# Altium PCB PCB1.PcbDoc
Units mil, origin at the board's own origin, x right, y up, seen from the top; angles counter-clockwise.
Board outline 4765 x 4565 mil, 2 copper layers (Top Layer, Bottom Layer); 51 components, 61 nets, 223 pads, 48 vias.
Unrouted connection lines stored in the file: 5.
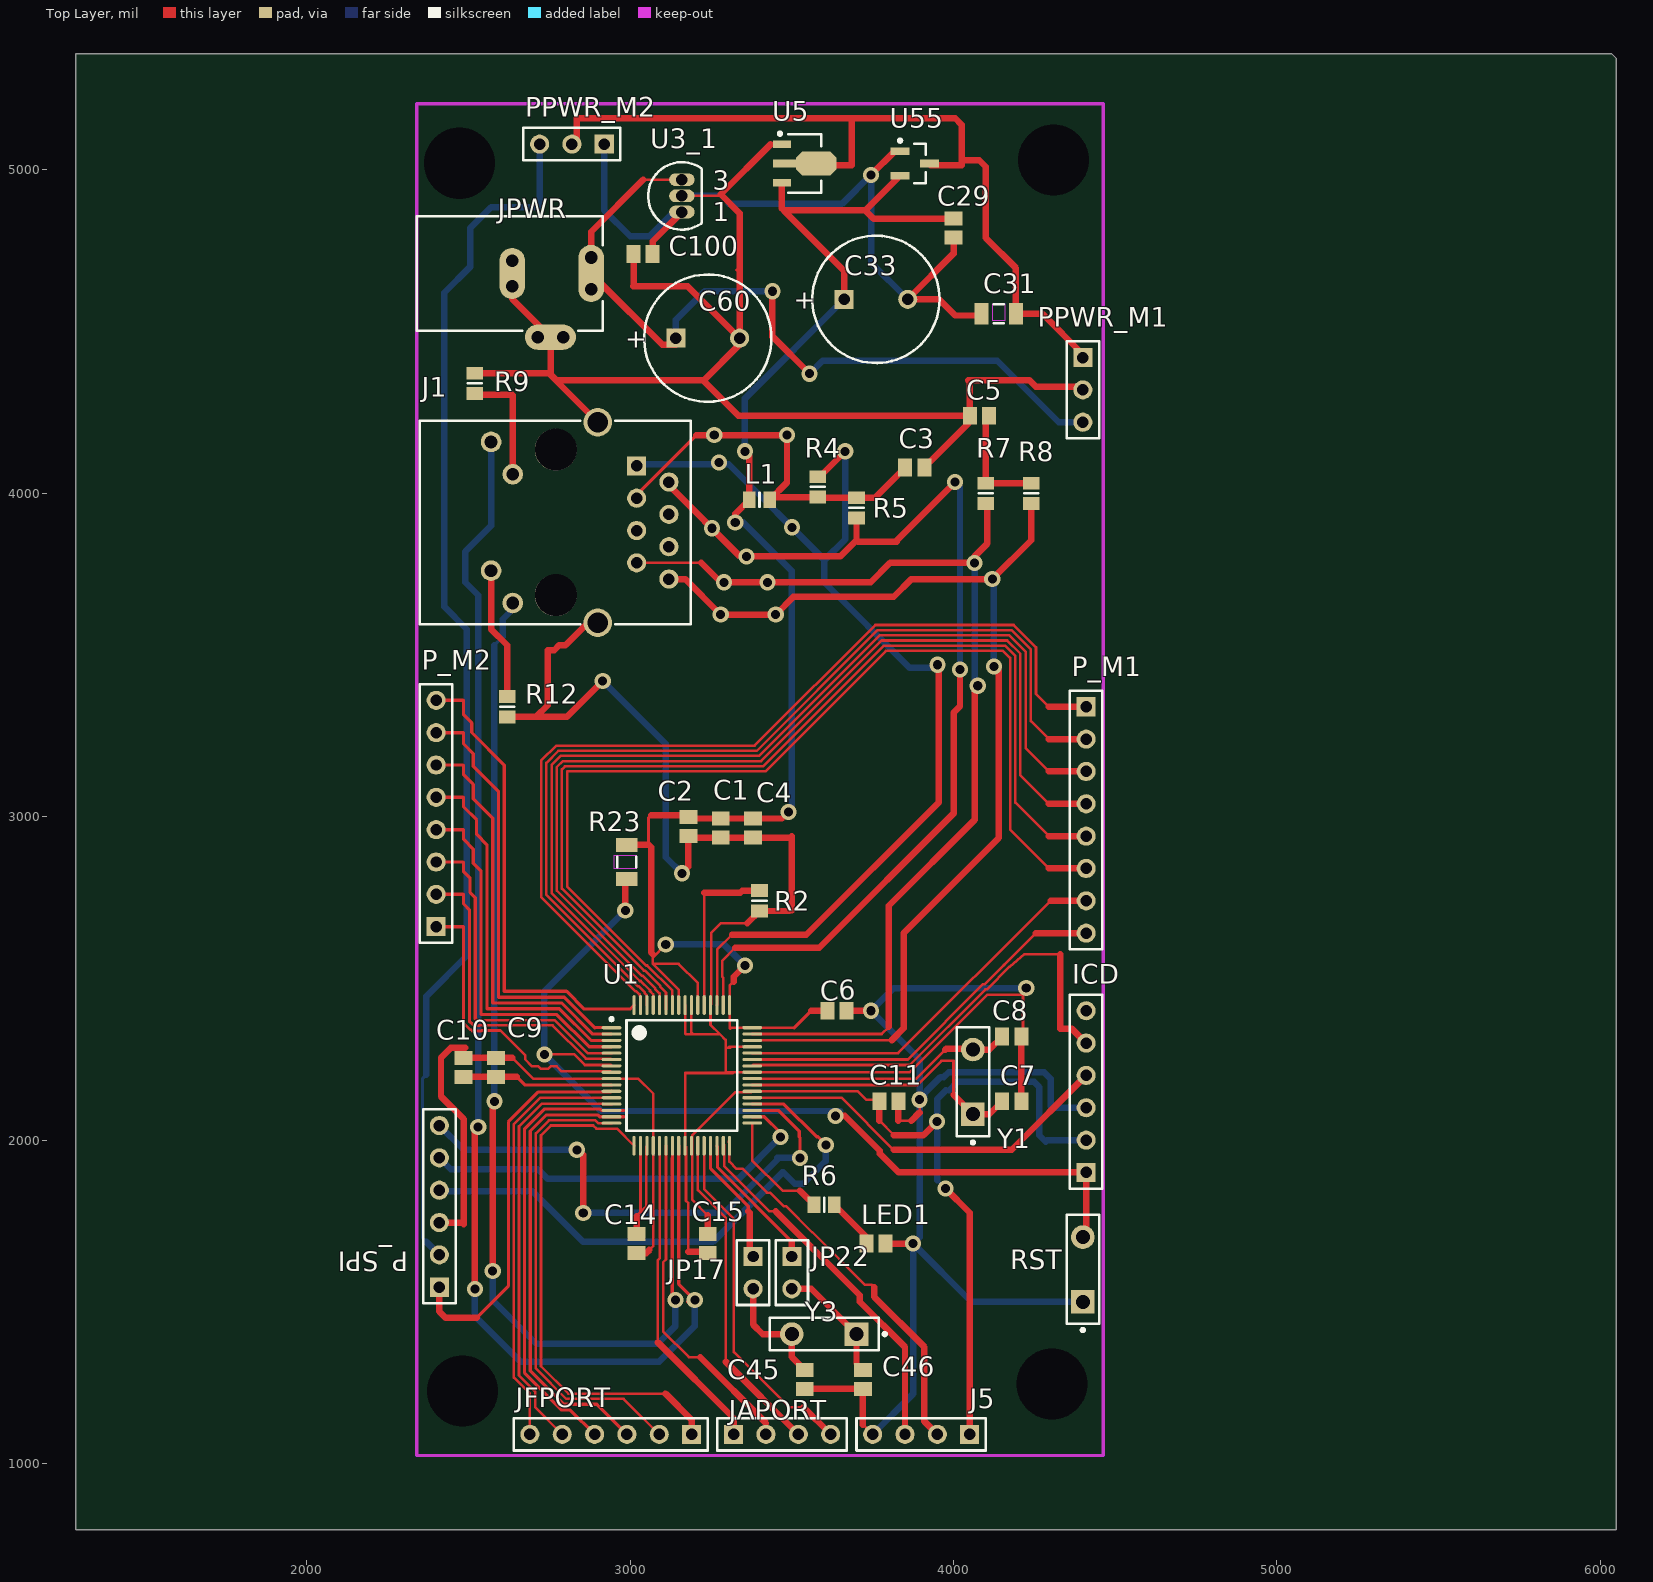
[diagram p0: Top Layer view]
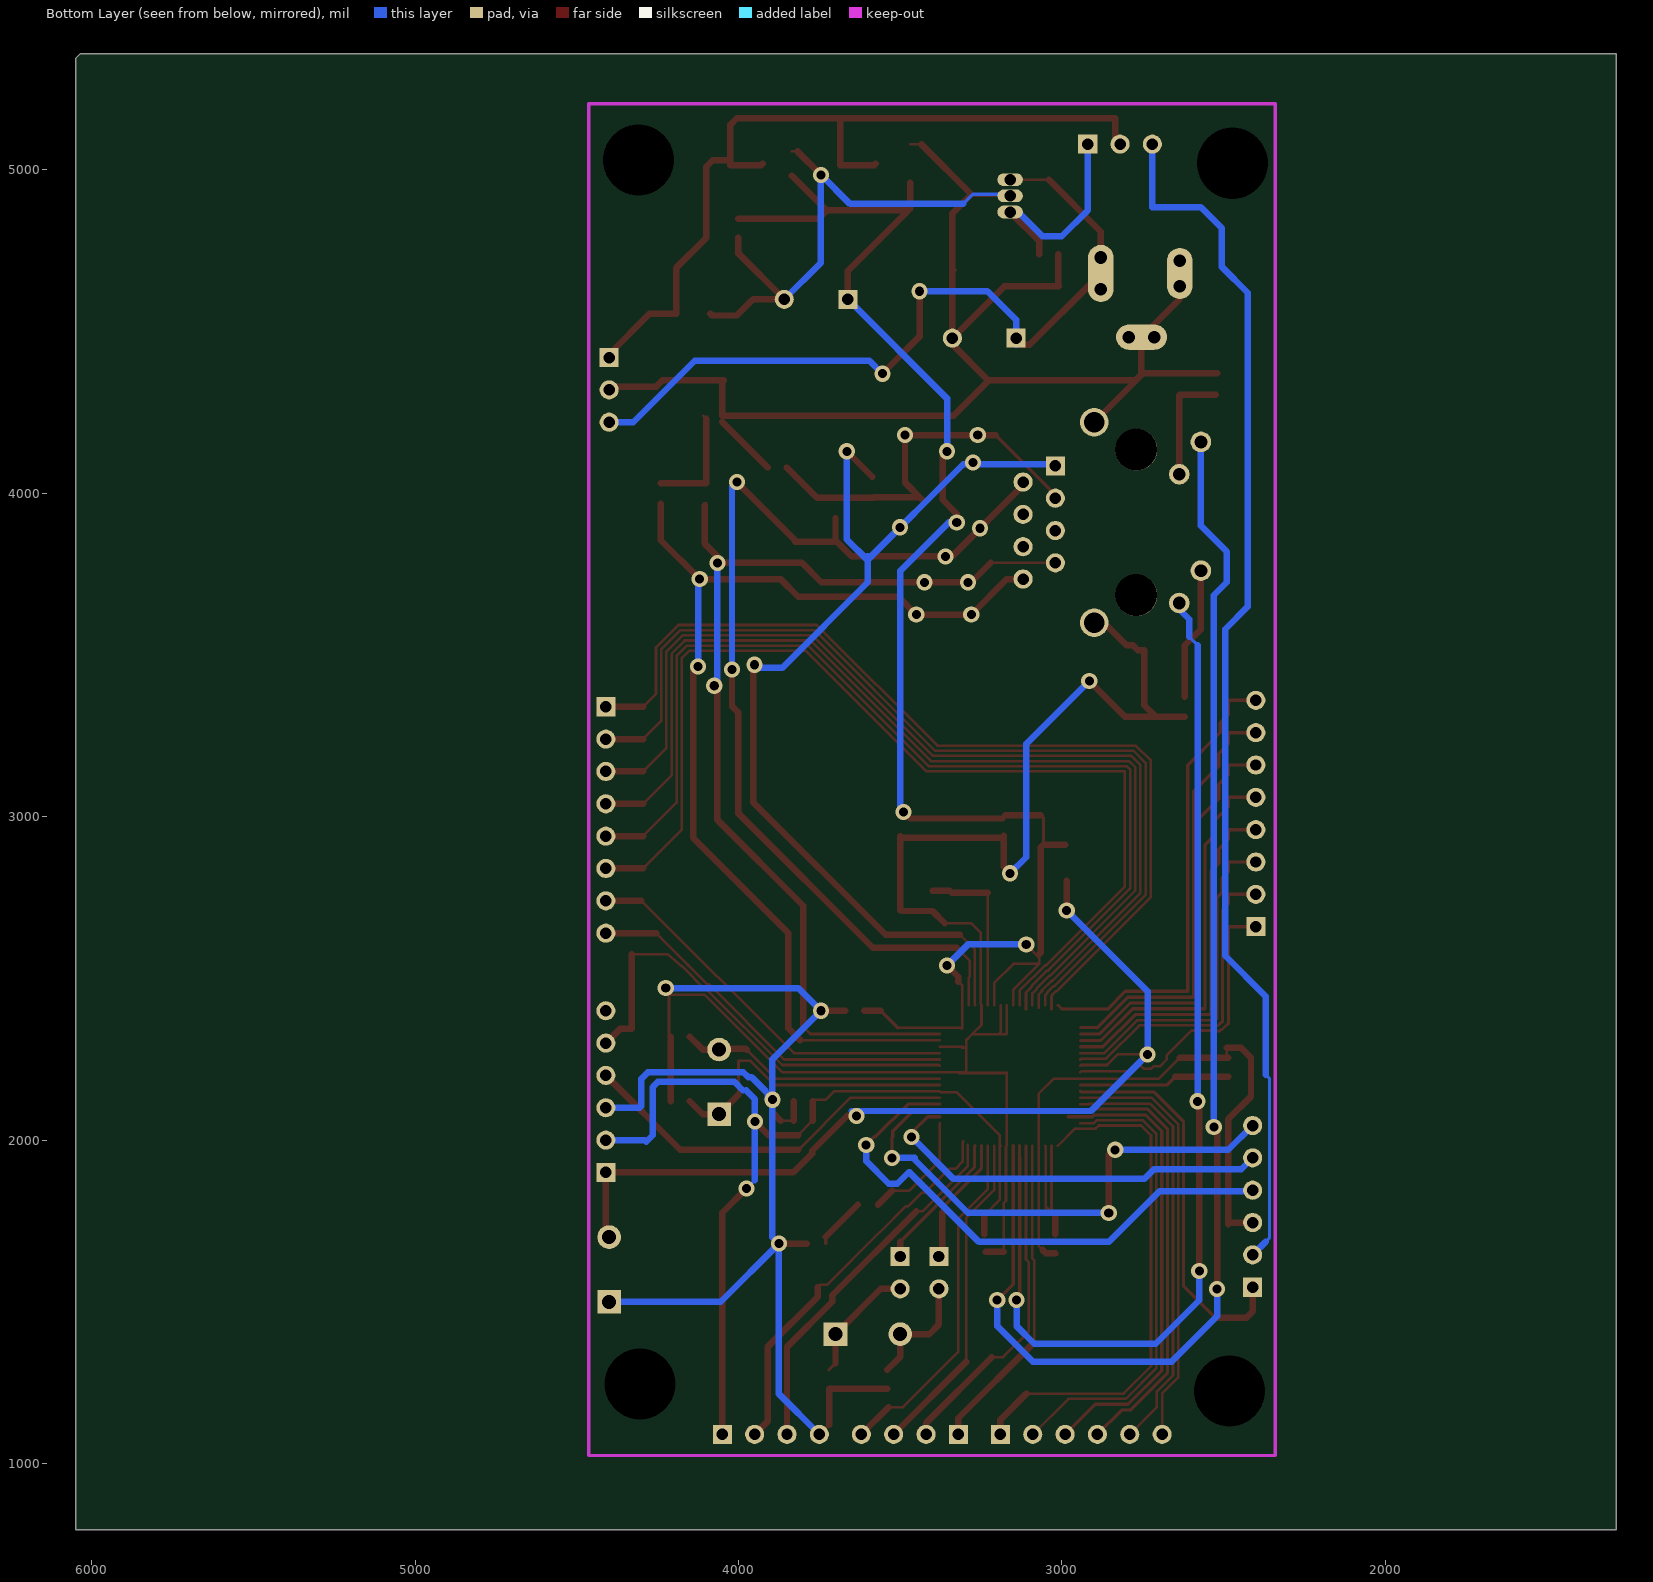
[diagram p1: Bottom Layer view, seen from below]

## Layer stack, top to bottom
Top Layer: signal copper 1.4
Dielectric: dielectric 12.6, FR-4, Dk 4.8
Bottom Layer: signal copper 1.4

## Board outline
1285,5360 1285,795 6050,795 6050,5345 6035,5360

## Design rules (kind name [scope] priority, off if disabled: settings)
Clearance [All] p1: gap=8
PolygonConnect [All] p1: connectstyle=Relief reliefconductorwidth=10 reliefentries=4 polygonreliefangle="90 Angle"
RoomDefinition Sheet_MAGJACK [InComponentClass('Sheet_MAGJACK')] p1: confinementstyle=ConfineIn formatcopy=TRUE lockcomponents=FALSE outline 4600,3765 4780,3765 4780,4105 4600,4105
RoomDefinition Sheet1 [InComponentClass('Sheet1')] p2: confinementstyle=ConfineIn formatcopy=TRUE lockcomponents=FALSE outline 4535,1535 4815,1535 4815,2115 4535,2115
RoutingVias [All] p1: holewidth=28 width=50 viastyle="Through Hole" minholewidth=28 minwidth=50 maxholewidth=28 maxwidth=50
SMDNeckDown [All] p1: percent=105.000
SilkscreenOverComponentPads [All] p1: minsilkscreentomaskgap=10
SolderMaskExpansion [All] p1: expansion=4
Width [All] p1: maxlimit=20 minlimit=8 preferedwidth=10
27 further rules are at their usual default settings.

## Classes and differential pairs
component class Sheet_MAGJACK: C3 C5 C29 C31 C33 C60 C100 J1 J5 JAPORT JFPORT JPWR L1 LED1 P_M1 P_M2 P_SPI PPWR_M1 PPWR_M2 R4 R5 R6 R7 R8 R9 R12 U3_1 U5 U55
component class Sheet1: C1 C2 C4 C6 C7 C8 C9 C10 C11 C14 C15 C45 C46 ICD JP17 JP22 R2 R23 RST U1 Y1 Y3

## Components (designator, comment, footprint, x,y, rotation, side; value= is the part's Value field where it differs from the comment)
C1 "0.1uF" CAPC2012L 3280,2965 r90 top
C2 "0.1uF" CAPC2012L 3180,2970 r90 top
C3 "0.1uF" CAPC2012L 3880,4080 r0 top
C4 "0.1uF" CAPC2012L 3380,2965 r90 top
C5 "0.1uF" CAPC2012L 4080,4240 r0 top
C6 "0.1uF" CAPC2012L 3640,2400 r180 top
C7 "33pF" CAPC2012L 4180,2120 r180 top
C8 "33pF" CAPC2012L 4180,2320 r180 top
C9 "1uF" CAPC2012L 2585.47,2225 r270 top
C10 "0.1uF" CAPC2012L 2485,2225 r270 top
C11 "0.1uF" CAPC2012L 3800,2120 r180 top
C14 "0.1uF" CAPC2012L 3020,1680 r90 top
C15 "0.1uF" CAPC2012L 3240,1680 r90 top
C29 "0.1uF" CAPC2012L 4000,4820 r90 top
C31 "2.2uF" CAPC3216L 4140,4555 r0 top
C33 "220mF" CAPPR5-10x12.5 3760,4600 r0 top
C45 "22pF" CAPC2012L 3540,1260 r90 top
C46 "22pF" CAPC2012L 3720,1260 r90 top
C60 "220mF" CAPPR5-10x12.5 3240,4480 r0 top
C100 "0.1uF" CAPC2012L 3040,4740 r0 top
ICD "Header 6" HDR1X6 4410,1900 r90 top
J1 "LU1T516-43LF" CON_RJ45_RA_LEDS 2770,3910 r90 top
J5 "Header 4" HDR1X4 4050,1090 r180 top
JAPORT "Header 4" HDR1X4 3320,1090 r0 top
JFPORT "Header 6" HDR1X6 3190,1090 r180 top
JP17 "Header 2" HDR1X2 3380,1640 r270 top
JP22 "Header 2" HDR1X2 3500,1640 r270 top
JPWR "PWR2.5" KLD-0202 2340,4680 r0 top
L1 "330" RESC2012L 3400,3980 r0 top
LED1 "LED2" CAPC2012L 3760,1680 r0 top
P_M1 "Header 8" HDR1X8 4410,3340 r270 top
P_M2 "Header 8" HDR1X8 2400,2660 r90 top
P_SPI "Header 6" HDR1X6 2410,1545 r90 top
PPWR_M1 "Header 3" HDR1X3 4400,4420 r270 top
PPWR_M2 "Header 3" HDR1X3 2920,5080 r180 top
R2 "2.26K 1%" RESC2012L 3400,2740 r90 top
R4 "49.9" RESC2012L 3580,4020 r90 top
R5 "49.9" RESC2012L 3700,3955 r270 top
R6 "180" RESC2012L 3600,1800 r0 top
R7 "49.9" RESC2012L 4100,4000 r270 top
R8 "49.9" RESC2012L 4240,4000 r270 top
R9 "180" RESC2012L 2520,4340 r270 top
R12 "180" RESC2012L 2620,3340 r270 top
R23 "10K" RESC3216L 2990,2860 r90 top
RST "SW-PB" SPST-2 4400,1600 r90 top
U1 "PIC18F67J60-I/PT" TQFP-PT64_L 3160,2200 r0 top
U3_1 "MC78L05ABP" 29-04 3160,4920 r0 top
U5 "MCP1703T-3302E/MB" SOT-89-MB3_N 3540,5020 r0 top
U55 "MCP1702T-3302E/CB" SOT-23A-CB3_N 3880,5020 r0 top
Y1 "25MHz" SPST-2 4060,2180 r90 top
Y3 "32KHz" SPST-2 3600,1400 r180 top

## Footprints (in the part's own frame and the unit in brackets; to place one, negate y for a bottom-side part, rotate by r counter-clockwise, add the part's x,y. Pads: shape width x height; smd on the part's side, far side on the other; paste and mask are expansions set on the pad)
29-04 [mm]
  oval 2x1 hole 0.9: 1(0,-1.27) 2(0,0) 3(0,1.27)
  silkscreen extent -2.65,-2.65 1.55,2.65
CAPC2012L [mm] "Chip Capacitor, Body 2.0x1.3mm, IPC High Density"
  rect 1.1x1.4 smd: 1(-0.75,0) 2(0.75,0)
  body extent -1.1,-0.72 1.1,0.72, height 1.4
CAPC3216L [mm] "Chip Capacitor, Body 3.2x1.6mm, IPC High Density"
  rect 1.1x1.7 smd: 1(-1.35,0) 2(1.35,0)
  silkscreen extent -0.4,-0.75 0.4,0.75, body extent -1.7,-0.9 1.7,0.9, height 1.3
CAPPR5-10x12.5 [mm] "Capacitor, Electrolytic, Radial; Body 10 x 12.5 mm (Dia.xH typ); Pin Spacing 5 mm (typ)"
  rect 1.5x1.5 hole 0.9: 1(-2.5,0)
  round 1.5 hole 0.9: 2(2.5,0)
  silkscreen extent -5,-5 5,5
CON_RJ45_RA_LEDS [mm]
  rect 1.5x1.5 hole 0.9: 1(4.445,-6.35)
  round 1.5 hole 0.9: 2(3.175,-8.89) 3(1.905,-6.35) 4(0.635,-8.89) 5(-0.635,-6.35) 6(-1.905,-8.89) 7(-3.175,-6.35) 8(-4.445,-8.89)
  round 1.62 hole 1: 9(6.325,5.08) 10(3.785,3.38) 11(-3.785,5.08) 12(-6.325,3.38)
  round 2.23 hole 1.6: MH1(7.875,-3.3) MH2(-7.875,-3.3)
  round 3.3 hole 3.3 unplated: MH3(5.715,0) MH4(-5.715,0)
  silkscreen extent -8,-10.6 8,10.7
HDR1X2 [mm] "Connector; Header; 2 Position"
  rect 1.5x1.5 hole 0.9: 1(0,0)
  round 1.5 hole 0.9: 2(2.54,0)
  silkscreen extent -1.27,-1.27 3.81,1.27
HDR1X3 [mm] "Connector; Header; 3 Position"
  rect 1.5x1.5 hole 0.9: 1(0,0)
  round 1.5 hole 0.9: 2(2.54,0) 3(5.08,0)
  silkscreen extent -1.27,-1.27 6.35,1.27
HDR1X4 [mm] "Connector; Header; 4 Position"
  rect 1.5x1.5 hole 0.9: 1(0,0)
  round 1.5 hole 0.9: 2(2.54,0) 3(5.08,0) 4(7.62,0)
  silkscreen extent -1.27,-1.27 8.89,1.27
HDR1X6 [mm] "Connector; Header; 6 Position"
  rect 1.5x1.5 hole 0.9: 1(0,0)
  round 1.5 hole 0.9: 2(2.54,0) 3(5.08,0) 4(7.62,0) 5(10.16,0) 6(12.7,0)
  silkscreen extent -1.27,-1.27 13.97,1.27
HDR1X8 [mm] "Connector; Header; 8 Position"
  rect 1.5x1.5 hole 0.9: 1(0,0)
  round 1.5 hole 0.9: 2(2.54,0) 3(5.08,0) 4(7.62,0) 5(10.16,0) 6(12.7,0) 7(15.24,0) 8(17.78,0)
  silkscreen extent -1.27,-1.27 19.05,1.27
KLD-0202 [mm]
  oval 2x4.5 all layers, no hole: 1(13.7,0)
  round 1.5 hole 1: 1A(13.7,-1.25) 1B(13.7,1.25) 2A(7.5,-1) 2B(7.5,1) 3A(9.5,-5) 3B(11.5,-5)
  oval 2x4 all layers, no hole: 2(7.5,0)
  oval 4x2 all layers, no hole: 3(10.5,-5)
  silkscreen extent 0,-4.5 14.6,4.5
RESC2012L [mm] "Chip Resistor, Body 2.0x1.3mm, IPC High Density"
  rect 1x1.3 smd: 1(-0.8,0) 2(0.8,0)
  silkscreen extent 0,-0.55 0,0.55, body extent -1.07,-0.7 1.07,0.7, height 2.54
RESC3216L [mm] "Chip Resistor, Body 3.1x1.6mm, IPC High Density"
  rect 1.1x1.7 smd: 1(-1.35,0) 2(1.35,0)
  silkscreen extent -0.4,-0.75 0.4,0.75, body extent -1.68,-0.87 1.68,0.87, height 2.54
SOT-23A-CB3_N [mm] "SOT346, 3-Leads, Body 2.9x1.5mm, Pitch 0.95mm, Lead Span 2.6mm, IPC Medium Density"
  rect 1.5x0.6 smd: 1(-1.15,0.95) 2(-1.15,-0.95) 3(1.15,0)
  silkscreen extent -1.27,-1.55 0.85,1.92, body extent -0.85,-1.55 0.85,1.55, height 1.45
SOT-89-MB3_N [mm] "SOT89, 3-Leads, Body 4.5x2.4 mm, Pitch 1.5mm, Lead Span 4.1mm, IPC Medium Density"
  rect 1.4x0.6 smd: 1(-1.8,1.5) 3(-1.8,-1.5)
  rect 1.8x0.6 smd: 2(-1.6,0)
  oct 3.2x1.9 smd: 2(0.9,0)
  silkscreen extent -2.07,-2.3 1.3,2.47, body extent -1.3,-2.3 1.3,2.3, height 1.6
SPST-2 [mm] "Circuit Breaker; 2 Leads"
  rect 1.85x1.85 hole 1.1: 1(-2.54,0)
  round 1.85 hole 1.1: 2(2.54,0)
  silkscreen extent -4.89,-1.27 4.28,1.27
TQFP-PT64_L [mm] "Thin QFP, 64-Leads, Body 10x10mm, Pitch 0.5mm, IPC High Density"
  oval 1.55x0.25 smd: 1(-5.525,3.75) 2(-5.525,3.25) 3(-5.525,2.75) 4(-5.525,2.25) 5(-5.525,1.75) 6(-5.525,1.25) 7(-5.525,0.75) 8(-5.525,0.25) 9(-5.525,-0.25) 10(-5.525,-0.75) 11(-5.525,-1.25) 12(-5.525,-1.75) 13(-5.525,-2.25) 14(-5.525,-2.75) 15(-5.525,-3.25) 16(-5.525,-3.75) 33(5.525,-3.75) 34(5.525,-3.25) 35(5.525,-2.75) 36(5.525,-2.25) 37(5.525,-1.75) 38(5.525,-1.25) 39(5.525,-0.75) 40(5.525,-0.25) 41(5.525,0.25) 42(5.525,0.75) 43(5.525,1.25) 44(5.525,1.75) 45(5.525,2.25) 46(5.525,2.75) 47(5.525,3.25) 48(5.525,3.75)
  oval 0.25x1.55 smd: 17(-3.75,-5.525) 18(-3.25,-5.525) 19(-2.75,-5.525) 20(-2.25,-5.525) 21(-1.75,-5.525) 22(-1.25,-5.525) 23(-0.75,-5.525) 24(-0.25,-5.525) 25(0.25,-5.525) 26(0.75,-5.525) 27(1.25,-5.525) 28(1.75,-5.525) 29(2.25,-5.525) 30(2.75,-5.525) 31(3.25,-5.525) 32(3.75,-5.525) 49(3.75,5.525) 50(3.25,5.525) 51(2.75,5.525) 52(2.25,5.525) 53(1.75,5.525) 54(1.25,5.525) 55(0.75,5.525) 56(0.25,5.525) 57(-0.25,5.525) 58(-0.75,5.525) 59(-1.25,5.525) 60(-1.75,5.525) 61(-2.25,5.525) 62(-2.75,5.525) 63(-3.25,5.525) 64(-3.75,5.525)
  silkscreen extent -5.65,-4.35 4.35,4.55, body extent -5,-5 5,5, height 1.2

## Part data
C1 C45 C46 C100: library part "Cap Semi", "Capacitor (Semiconductor SIM Model)"
C2 C3 C4 C5 C6 C7 C8 C9 C10 C11 C14 C15 C29 C31: library part Cap, "Capacitor"
C33 C60: library part "Cap Pol1", "Polarized Capacitor (Radial)"
ICD JFPORT P_SPI: "Header, 6-Pin"
J1: library part Component_1
J5 JAPORT: "Header, 4-Pin"
JP17 JP22: "Header, 2-Pin"
JPWR: "DC Power Jack, 2.5mm, KLD Series, PCB Mount"
L1: library part "Inductor Iron", "Magnetic-Core Inductor"
LED1: "Typical RED, GREEN, YELLOW, AMBER GaAs LED"
P_M1 P_M2: "Header, 8-Pin"
PPWR_M1 PPWR_M2: "Header, 3-Pin"
R2 R4 R5 R7 R8 R9 R12: library part Res2, "Resistor"
R6 R23: library part "Res Semi", "Semiconductor Resistor"
RST: "Switch"
U1: "High Performance, 1-Mbit Flash Microcontroller with Ethernet, 128K Flash, 64-Pin TQFP, Industrial Temperature Range"
U3_1: "Three-Terminal Low Current Positive Voltage Regulator"
U5: "250 mA, 16V, Low Quiescent Current LDO Regulator, 3-Pin SOT-89, Extended Temperature, Tape and Reel"
U55: "250 mA Low Quiescent Current LDO Regulator, 3-Pin SOT-23A, Extended Temperature, Tape and Reel"
Y1 Y3: library part XTAL, "Crystal Oscillator"

## Free pads (board coordinates)
  round 60 hole 220: 0(2472,5021) 0(2482,1224) 0(4304,1246) 0(4309,5031)

## Via types
v1: diameter 50, hole 28, Top Layer to Bottom Layer, 48 vias

## Nets (pads, with @x,y where several pads share a name; then routed paths per layer and width w, separated by ;. In a path a pad name is that pad's centre, name@x,y a point inside that pad or via, vN(x,y) a via of type N, cw(c..) or ccw(c..) an arc to the next point about the centre after c; other vN are vias at no path point)
+3.3: C1.2 C2.2 C4.2 C6.2 C11.2 C14.2 C15.2 C29.2 C33.1 ICD.2 J5.1 L1.1 R23.2 U1.18 U1.19 U1.26 U1.38 U1.48 U1.49 U1.54 U1.57 U5.3 U55.2 | length 8679.7
  Top Layer w8: 3020,1765 3032.05,1777.05 ; U1.18 3032.05,1777.05 ; U1.19 3050,1980.75 3050,1790 3045,1790 3032.05,1777.05 ; 3065,2905 3056.85,2913.15 3056.85,2996.85 3065,3005 ; 3070.17,2575 3070.17,2545 ; v1(3110,2605) 3070.17,2565.17 3070.17,2545 ; U1.57 3150.16,2465.01 3070.17,2545 ; C2.2@3174.53,3005 C2.2 C2.2@3185,2994.53 ; U1.54 3209.21,2485.79 3150,2545 3070.17,2545 ; 3240,1767.37 3192.29,1815.08 3192.29,1979.72 U1.26 3192.29,1985.24 3192.29,2015.08 3325.23,2148.02 3374.76,2148.02 U1.38 3704.21,2150.79 3730,2125 3765.47,2125 C11.2 ; 3320,2490 3307.64,2477.64 U1.49 3307.64,2347.36 3310,2345 3312.64,2347.64 U1.48 3507.64,2347.64 ; v1(3325,3910) 3325,3936.5 ; 3469.13,4880.87 3475,4875 ; 3469.53,2994.53 v1(3490,3015) ; 3770.47,2060 3815.47,2015
  Top Layer w10: 3507.64,2347.64 3560,2400
  Top Layer w20: R23.2 3056.85,2913.15 ; C14.2 3020,1765 ; 3065,2905 3065,2580.17 3070.17,2575 ; 3065,3005 C2.2@3174.53,3005 ; C2.2@3185,2994.53 C1.2 C4.2 3469.53,2994.53 ; C15.2 3240,1767.37 ; 3320,2490 3320,2505 v1(3355,2540) ; 3325,3936.5 L1.1 3368.5,4116.5 v1(3355,4130) ; 3469.13,4880.87 U5.3 ; 3560,2400 C6.2 ; C33.1 3661.57,4688.43 3475,4875 3727.13,4875 ; 3770.47,2060 C11.2 ; 3815.47,2015 3907.02,2015 v1(3949.02,2057) ; U55.2 3727.13,4875 ; v1(3975,1850) 4050,1775 J5.1 ; C29.2 3752.6,4849.53 3727.13,4875
  Bottom Layer w8: 3949.02,1875.98 v1(3975,1850) ; 3976.63,2154 3986.63,2154 ; 4285,1995 4290,2000
  Bottom Layer w20: v1(3110,2605) 3290,2605 v1(3355,2540) ; v1(3325,3910) 3350,3910 3500,3760 3500,3025 v1(3490,3015) ; v1(3355,4130) 3355,4293.43 C33.1 ; 3949.02,1875.98 v1(3949.02,2057) 3949.02,2126.4 3976.63,2154 ; 3986.63,2154 4012.63,2180 4249,2180 4265,2164 4265,2015 4285,1995 ; 4290,2000 ICD.2
+5: C100.2 PPWR_M2.1 U3_1.1 | length 676.7
  Top Layer w20: C100.2 3069.53,4779.53 U3_1.1
  Bottom Layer w20: PPWR_M2.1 2920,4875 3000,4795 3060,4795 3135,4870 U3_1.1
+12: C60.1 JPWR.1 JPWR.1A JPWR.1B PPWR_M1.3 U3_1.3 | length 3106.7
  Top Layer w8: 3040,4970 U3_1.3
  Top Layer w20: 3040,4970 2879.37,4809.37 JPWR.1 ; C60.1@3141.57,4460 3099.37,4460 ; v1(3440,4625) 3440,4485 v1(3555,4370) ; JPWR.1 3099.37,4460 ; JPWR.1 JPWR.1@2903.98,4655.39 ; JPWR.1 JPWR.1@2903.98,4655.39 ; JPWR.1@2903.98,4655.39 3099.37,4460 ; JPWR.1@2903.98,4655.39 3099.37,4460
  Bottom Layer w20: C60.1@3141.57,4460 3141.57,4536.57 3230,4625 v1(3440,4625) ; v1(3555,4370) 3595,4410 4135,4410 4325,4220 PPWR_M1.3
GND: C1.1 C2.1 C3.2 C4.1 C5.1 C6.1 C7.1 C8.1 C9.1 C10.1 C11.1 C14.1 C15.1 C29.1 C31.1 C33.2 C45.1 C46.1 C60.2 C100.1 ICD.3 J1.MH1 J1.MH2 J5.4 JPWR.2 JPWR.2A JPWR.2B JPWR.3 JPWR.3A JPWR.3B LED1.2 P_SPI.3 PPWR_M1.2 R2.1 R9.1 R12.2 RST.1 U1.9 U1.20 U1.25 U1.41 U1.45 U1.52 U1.55 U1.56 U3_1.2 U5.1 U55.1 | length 17342.9
  Top Layer w8: 2480,1745 2485,1740 ; C10.1 2490,2259.53 2490,2285 ; C9.1 C9.1@2585.94,2255 ; 2635,2255 2699.84,2190.16 U1.9 2942.64,2190 3025,2190 3071.42,2143.58 U1.20 3071.42,1671.89 3059.76,1660.24 ; JPWR.2@2635.28,4601.26 JPWR.2A ; 2751.5,4371.5 2755,4375 2780,4350 ; JPWR.3 JPWR.3@2755,4481.54 ; J1.MH2@2869.96,3599.96 J1.MH2 ; 3010,4640 3010.47,4640.47 ; C14.1@3014.53,1645 C14.1 ; v1(3160,2825) 3180,2845 ; U3_1.2 3275,4920 3280,4925 ; U1.56 3169.84,2330.16 3172.1,2327.9 3195,2327.9 ; 3180,1655 3180,1804.75 3172.61,1812.14 3172.61,1979.72 U1.25 3169.84,2207.55 3317.29,2207.55 3315,2209.84 ; C2.1 C2.1@3185,2935.47 ; U1.55 3189.53,2333.37 3195,2327.9 ; 3225,4350 3230,4350 3230,4351.57 ; C15.1@3235.47,1655 C15.1 ; 3306.42,2288.58 U1.45 ; 3310,2285 3295,2285 ; 3362.5,2671 3280.75,2671 3251.35,2641.6 3251.35,2420.28 U1.52 3248.58,2356.42 3277.1,2327.9 ; 3434.06,5079.06 U5.1 ; 3491.5,2708.5 3495,2705 3500,2710 ; 3495.47,2935.47 3500,2940 ; 3720,1120 J5.4 ; U55.1@3817.4,5057.4 U55.1 ; 3829.53,2060 3870,2060 ; 3895,2085 v1(3895,2125) ; C5.1@4050.47,4220.94 C5.1 ; C8.1 4215,2325.47 v1@4215,2450 ; v1(4225,2470) 4215,2460 v1@4215,2450 ; 3195,2327.9 3277.1,2327.9 ; 3277.1,2327.9 3295,2310 3295,2285 ; 3295,2285 3295,2210 3305,2210 3304.84,2209.84 3315,2209.84 ; 3315,2209.84 U1.41 3864.84,2209.84 4105,2450 v1@4215,2450
  Top Layer w10: 3328.9,4690.47 3338.43,4700
  Top Layer w20: P_SPI.3 2480,1745 ; 2485,1740 2485,2065 2415,2135 2415,2255 2445,2285 2490,2285 ; C10.1 C9.1 ; R9.1 2748.47,4371.5 J1.MH1 ; C9.1@2585.94,2255 2635,2255 ; R12.2 2708.5,3308.5 ; 2755,4375 JPWR.3@2755,4481.54 ; 2780,4350 3225,4350 3335,4240 C5.1 4050.47,4344.53 4045,4350 4235,4350 4255,4330 4390,4330 PPWR_M1.2 ; J1.MH2@2869.96,3599.96 2800,3530 2780,3530 2765,3515 2745,3515 2745,3345 2708.5,3308.5 ; v1(2915,3420) 2803.5,3308.5 2708.5,3308.5 ; 3010,4640 3178.43,4640 C60.2 ; 3010.47,4640.47 C100.1 ; C14.1 3050,1650.47 3059.76,1660.24 ; 3180,1655 C15.1@3235.47,1655 ; 3180,2845 C2.1 ; C2.1@3185,2935.47 C1.1 C4.1 3495.47,2935.47 ; 3230,4351.57 3338.43,4460 3338.43,4700 3338.43,4866.57 3280,4925 3434.06,5079.06 ; 3362.5,2671 R2.1 3491.5,2708.5 ; 3500,2710 3500,2940 ; C45.1 C46.1 3720,1120 ; C6.1 v1(3745,2400) ; v1(3745,4985) U55.1@3817.4,5057.4 ; LED1.2 v1(3875,1680) ; 3829.53,2060 C11.1 ; 3870,2060 3895,2085 ; C3.2 C5.1@4050.47,4220.94 ; C29.1 4000,4741.57 C33.2 3955,4600 4005,4550 4081.85,4550 C31.1 ; C7.1 C8.1 ; JPWR.2@2635.28,4601.26 JPWR.3 2733.7,4502.84 JPWR.2@2635.28,4601.26
  Bottom Layer w8: v1(3875,1680) 3895,1700 ; v1@3915,2125 3915,2150 ; 3960,2195 3970,2195 ; 4300,2105 4305,2100
  Bottom Layer w10: U3_1.2 3165,4925 3275,4925 3305,4895
  Bottom Layer w20: v1(2915,3420) 3110,3225 3110,2875 v1(3160,2825) ; 3305,4895 3655,4895 v1(3745,4985) 3745,4713.43 C33.2 ; J5.4 3875,1215 v1(3875,1680) 4055,1500 RST.1 ; 3895,1700 v1(3895,2125) 3895,2250 v1(3745,2400) 3815,2470 v1(4225,2470) ; 3915,2150 3960,2195 ; 3970,2195 3985,2210 4280,2210 4300,2190 4300,2105 ; 4305,2100 ICD.3
NetC3_1: C3.1 J1.3 L1.2 R4.1 R5.1 | length 1223.9
  Top Layer w10: J1.3 3020,3995.14 3204.86,4180 ; R4.1 R4.1@3582.01,3986.5
  Top Layer w20: 3204.86,4180 v1(3485,4180) 3485,4033.5 L1.2 ; L1.2@3440,3988.5 R4.1 ; R4.1@3582.01,3986.5 R5.1 3756.97,3986.5 C3.1
  other v1: 3260,4180
NetC5_2: C5.2 R7.1 R8.1 | length 352.5
  Top Layer w8: C5.2@4100,4230.47 C5.2
  Top Layer w20: C5.2@4100,4230.47 R7.1 R8.1
NetC7_2: C7.2 U1.39 Y1.1 | length 950.2
  Top Layer w8: U1.39 3888.1,2170.47 3962.63,2245 4000,2245 4000,2140
  Top Layer w20: 4000,2140 Y1.1 4110.47,2080 C7.2
NetC8_2: C8.2 U1.40 Y1.2 | length 828.4
  Top Layer w8: U1.40 3885.16,2190.16 3975,2280
  Top Layer w20: 3975,2280 3977,2282 4058,2282 Y1.2 4110.47,2280 C8.2
NetC9_2: C9.2 C10.2 U1.10 | length 468.2
  Top Layer w10: 2649.53,2195.47 2675,2170 2942.01,2170 U1.10
  Top Layer w20: C10.2 C9.2 2649.53,2195.47
NetC45_2: C45.2 JP17.2 Y3.2 | length 369.5
  Top Layer w20: JP17.2 3380,1430 3410,1400 Y3.2 3500,1329.53 C45.2
NetC46_2: C46.2 JP22.2 Y3.1 | length 376.7
  Top Layer w10: C46.2@3700,1309.53 C46.2
  Top Layer w20: JP22.2 3560,1540 Y3.1 C46.2@3700,1309.53
NetICD_1: ICD.1 R23.1 RST.2 U1.7 | length 2934.9
  Top Layer w8: v1(2735,2265) 2827.37,2265 2860.08,2232.29 2939.72,2232.29 U1.7 ; R23.1@2985,2801.85 R23.1
  Top Layer w20: v1(2985,2710) R23.1@2985,2801.85 ; v1(3635,2075) 3663.89,2075 3772,1966.89 3772,1958.4 3830.4,1900 ICD.1 RST.2@4410,1710
  Top Layer w22: RST.2 RST.2@4410,1710
  Bottom Layer w20: v1(2985,2710) 2735,2460 v1(2735,2265) 2910,2090 3650,2090 v1(3635,2075)
NetICD_4: ICD.4 U1.37 | length 1194.5
  Top Layer w8: U1.37 3653.9,2131.1 3815,1970
  Top Layer w20: 3815,1970 4180,1970 ICD.4
NetICD_5: ICD.5 U1.42 | length 1422.3
  Top Layer w8: U1.42 3380.28,2232.29 3864.66,2232.29 4098.37,2466 4103.63,2466 4173.81,2536.19 4220,2575 4330,2575
  Top Layer w20: 4330,2575 4330,2345 4365,2345 ICD.5
NetJ1_1: J1.1 R4.2 U1.51 | length 3216.9
  Top Layer w8: U1.51 3269,2418.25 3269,2589 3315,2635 ; R4.2 R4.2@3586.5,4051.5 ; v1(3950,3470) 3950,3465 3955,3460 v1@3954,3459
  Top Layer w20: 3315,2635 3545,2635 3954,3044 v1@3954,3459 ; R4.2@3586.5,4051.5 v1(3665,4130)
  Bottom Layer w8: J1.1 J1.1@3025,4090 ; v1(3950,3470) 3950,3465 v1@3955,3460
  Bottom Layer w20: J1.1@3025,4090 3305,4090 3601.29,3793.71 3665,3857.42 v1(3665,4130) ; 3600,3805 3600,3725 3865,3460 v1@3955,3460
  other v1: 3500,3895 3275,4095
NetJ1_2: J1.2 R5.2 U1.50 | length 3231.6
  Top Layer w8: J1.2@3120,4025 J1.2 ; U1.50 3287.95,2502.05 3285,2505 3285,2555 3325,2595 ; 3825,3850 3825,3855
  Top Layer w20: J1.2@3120,4025 3340,3805 3650,3805 3700,3855 R5.2 ; 3325,2595 3585,2595 4000,3010 4000,3321.67 4020,3341.67 v1(4020,3455) ; 3705,3850 3825,3850 ; 3825,3855 v1(4005,4035)
  Bottom Layer w8: v1(4005,4035) v1@4020,4020
  Bottom Layer w20: v1(4020,3455) v1@4020,4020
  other v1: 3360,3805 3252.98,3892.02
NetJ1_7: J1.7 R7.2 U1.47 | length 3277.4
  Top Layer w8: J1.7 3220,3785 ; U1.47 3777.95,2327.95 3800,2350 ; v1(4065,3785) v1@4065,3805 ; R7.2 R7.2@4105,3963.5
  Top Layer w20: 3220,3785 3280,3725 3743.75,3725 3803.75,3785 v1(4065,3785) ; 3800,2350 3800,2725 4065,2990 v1@4065,3405 ; v1@4065,3805 4105,3845 R7.2@4105,3963.5
  Bottom Layer w20: v1(4065,3785) 4065,3415 v1(4075,3405)
  other v1: 3290,3725 3425,3725
NetJ1_8: J1.8 R8.2 U1.46 | length 3377.5
  Top Layer w8: U1.46 3808.27,2308.27 ; v1(4125,3465) v1@4140,3450
  Top Layer w20: J1.8 3170,3735 v1(3280,3625) v1(3450,3625) 3505,3680 3815,3680 3870,3735 v1(4120,3735) 4240,3855 R8.2 ; 3808.27,2308.27 3845.64,2345.64 3845.64,2640.01 4140,2934.37 v1@4140,3450
  Bottom Layer w8: v1(4120,3735) v1@4125,3730
  Bottom Layer w20: v1(4125,3465) v1@4125,3730
NetJ1_9: J1.9 U1.24 | length 4143.6
  Top Layer w9.74: 3150.16,1945 U1.24
  Top Layer w10: 3150.16,1945 3150.16,1554.84 v1(3200,1505) 3183,1505 v1@3178,1500
  Top Layer w20: v1(2520,1540) 2520,2030 v1(2530,2040)
  Bottom Layer w20: v1(2520,1540) 2520,1455 2660,1315 3090,1315 3200,1425 v1(3200,1505) ; v1(2530,2040) 2530,3685 2490,3725 2490,3820 2570,3900 J1.9
NetJ1_10: J1.10 R9.2 | length 363.2
  Top Layer w10: R9.2 R9.2@2523.5,4305 ; 2635,4305 2636.93,4303.07
  Top Layer w20: R9.2@2523.5,4305 2635,4305 ; J1.10 2636.93,4303.07
NetJ1_11: J1.11 R12.1 | length 410.2
  Top Layer w20: J1.11 2570,3580 2620,3530 R12.1
NetJ1_12: J1.12 U1.23 | length 3396.8
  Top Layer w9.74: 3130.47,1945 U1.23
  Top Layer w10: 3130.47,1945 3130.47,1514.53 v1(3140,1505) 3145,1505 v1@3145,1500
  Top Layer w20: v1(2575,1595) 2575,2115 v1(2580,2120)
  Bottom Layer w10: 2580,3530 2605.88,3555.88 ; J1.12@2636.93,3641.93 J1.12
  Bottom Layer w20: v1(2575,1595) 2575,1505 2710,1370 3085,1370 3140,1425 v1(3140,1505) ; v1(2580,2120) 2580,3530 ; 2605.88,3555.88 2605.88,3610.88 J1.12@2636.93,3641.93
NetJ5_2: J5.2 U1.32 | length 1208.7
  Top Layer w8: U1.32@3304.87,1996.31 3304.87,1993.47 3306.72,1991.63 3306.72,1933.28 3328.67,1911.33 3348.67,1911.33 3422.58,1837.42 3432.58,1837.42 3474.54,1795.46 3482.17,1795.46 3562.63,1715 3563.75,1715 3726.18,1552.57 3747.43,1552.57 3755,1545
  Top Layer w20: 3755,1545 3755,1515 3910,1360 3910,1130 J5.2
NetJ5_3: J5.3 U1.31 | length 1204.1
  Top Layer w8: 3450.54,1779.46 3430.54,1779.46 3290.72,1919.28 ; 3290.72,1919.28 3290.72,1985 3290.72,1982.48 3290.72,1919.28
  Top Layer w20: 3450.54,1779.46 3710.18,1519.82 3710.18,1499.82 3850,1360 J5.3
NetJAPORT_1: JAPORT.1 U1.21 | length 991.6
  Top Layer w8: 3085.94,1374.06 3085.94,1628.82 3091.1,1633.98 U1.21
  Top Layer w20: 3085.94,1374.06 3320,1140 JAPORT.1
NetJAPORT_2: JAPORT.2 U1.22 | length 1048.4
  Top Layer w8: U1.22 3110.79,1631.04 3101.94,1622.2 3101.94,1408.06 3181.46,1328.54 3216.46,1328.54 ; JAPORT.2 3420,1125
  Top Layer w20: 3216.46,1328.54 3420,1125
NetJAPORT_3: JAPORT.3 U1.27 | length 1021.2
  Top Layer w8: U1.27 3209.21,1845.79 3295,1760 3295,1315
  Top Layer w20: 3295,1315 JAPORT.3
NetJAPORT_4: JAPORT.4 U1.28 | length 1080.8
  Top Layer w8: U1.28 3228.9,1848.73 3321,1756.63 3321,1344 3491,1174 3536,1174
  Top Layer w20: 3536,1174 JAPORT.4
NetJFPORT_1: JFPORT.1 U1.17 | length 1619.5
  Top Layer w8: U1.17 2959.4,2035.44 2895.4,2035.44 2885.84,2045 2755,2045 2724.4,2014.4 2724.4,1300.6 2809,1216 3109,1216
  Top Layer w20: 3109,1216 3190,1135 JFPORT.1
NetJFPORT_2: JFPORT.2 U1.16 | length 1447.4
  Top Layer w8: U1.16 2901.1,2052.36 2892.47,2061 2748.37,2061 2708.4,2021.02 2708.4,1293.98 2802.37,1200 2980,1200 JFPORT.2
NetJFPORT_3: JFPORT.3 U1.15 | length 1470.6
  Top Layer w9.74: U1.15 2980,2072.05
  Top Layer w10: 2980,2072.05 2905.46,2072.05 2899.51,2078 2741.33,2078 2691.4,2028.07 2691.4,1286.93 2795.33,1183 2897,1183 JFPORT.3
NetJFPORT_4: JFPORT.4 U1.14 | length 1422.1
  Top Layer w9.74: U1.14 2980,2091.73
  Top Layer w10: JFPORT.4 2815,1165 2787.88,1165 2673.4,1279.48 2673.4,2035.52 2733.88,2096 2906.96,2096 2911.23,2091.73 2980,2091.73
NetJFPORT_5: JFPORT.5 U1.13 | length 1323.8
  Top Layer w8: JFPORT.5 2706,1174 2706,1222.83 2656.4,1272.44 2656.4,2042.56 2726.83,2113 2914,2113 2915.59,2111.42 U1.13
NetJFPORT_6: JFPORT.6 U1.12 | length 1425.7
  Top Layer w8: 2690,1200 JFPORT.6 2690,1216.21 2640.4,1265.81 2640.4,2049.19 2722.31,2131.1 U1.12
NetJP17_1: JP17.1 U1.29 | length 396.9
  Top Layer w10: U1.29 3248.58,1911.92 3365,1795.5 3365,1780 ; JP17.1@3370,1650 JP17.1
  Top Layer w20: 3365,1780 3370,1775 JP17.1@3370,1650
NetJP22_1: JP22.1 U1.30 | length 438.5
  Top Layer w10: U1.30 3270.03,1980.72 3270.03,1915.93 3500,1685.96
  Top Layer w20: JP22.1 3500,1685.96
NetLED1_1: LED1.1 R6.2 | length 161
  Top Layer w10: LED1.1 LED1.1@3730.47,1701.02
  Top Layer w20: R6.2 LED1.1@3730.47,1701.02
NetP_M1_1: P_M1.1 U1.63 | length 2945
  Top Layer w8: U1.63@3032.05,2405 3032.05,2444.41 3029.28,2447.18 3029.28,2450.12 3019.37,2460.03 3016.43,2460.03 2725,2751.46 2725,3173.14 2771.86,3220 3385,3220 3758,3593 4185.88,3593 4255,3523.88 4255,3380 4295,3340
  Top Layer w20: 4295,3340 P_M1.1
NetP_M1_2: P_M1.2 U1.62 | length 2987.6
  Top Layer w8: U1.62 3051.73,2447.36 3045.28,2453.81 3045.28,2456.75 3026,2476.03 3023.06,2476.03 2741,2758.09 2741,3166.51 2778.49,3204 3391.63,3204 3764.63,3577 4179.25,3577 4239,3517.25 4239,3296 4295,3240
  Top Layer w20: 4295,3240 P_M1.2
NetP_M1_3: P_M1.3 U1.61 | length 3050.3
  Top Layer w8: U1.61@3071.42,2410 3071.42,2450.3 3061.28,2460.43 3061.28,2463.37 3032.63,2492.03 3029.68,2492.03 2757,2764.72 2757,3159.88 2785.12,3188 3398.25,3188 3771.25,3561 4172.62,3561 4223,3510.62 4223,3212 4295,3140
  Top Layer w20: 4295,3140 P_M1.3
NetP_M1_4: P_M1.4 U1.60 | length 3097.9
  Top Layer w8: U1.60 3091.1,2453.24 3077.28,2467.06 3077.28,2470 3039.25,2508.03 3036.31,2508.03 2773,2771.34 2773,3153.25 2791.75,3172 3404.88,3172 3777.88,3545 4165.99,3545 4207,3503.99 4207,3128 4295,3040
  Top Layer w20: 4295,3040 P_M1.4
NetP_M1_5: P_M1.5 U1.59 | length 3165.6
  Top Layer w8: U1.59@3110.79,2405 3110.79,2456.18 3093.28,2473.69 3093.28,2476.63 3045.88,2524.03 3042.94,2524.03 2789,2777.97 2789,3146.63 2798.37,3156 3411.51,3156 3784.51,3529 4159.37,3529 4191,3497.37 4191,3044 4295,2940
  Top Layer w20: 4295,2940 P_M1.5
NetP_M1_6: P_M1.6 U1.58 | length 3208.2
  Top Layer w8: U1.58 3130.47,2462.07 3052.51,2540.03 3049.57,2540.03 2805,2784.6 2805,3140 3418.14,3140 3791.14,3513 4152.74,3513 4175,3490.74 4175,2960 4295,2840
  Top Layer w20: 4295,2840 P_M1.6
NetP_M1_7: P_M1.7 U1.44 | length 1227.6
  Top Layer w8: U1.44 3828.9,2268.9 4300,2740
  Top Layer w20: 4300,2740 P_M1.7
NetP_M1_8: P_M1.8 U1.43 | length 1194.6
  Top Layer w8: U1.43 3858.96,2249.21 4091.75,2482 4097,2482 4156.18,2541.18 4156.18,2541.65 4254.53,2640 4255,2640
  Top Layer w20: 4255,2640 P_M1.8
NetP_M2_1: P_M2.1 U1.8 | length 920.2
  Top Layer w8: 2485,2360 2486.41,2360 2505.69,2340.73 2508.51,2340.73 2511.79,2337.46 2539.12,2337.46 2540.67,2339 2599,2339 2675,2263 2675,2250 2697,2228 2716,2228 2724,2220 2746,2220 2754,2228 2773,2228 2788.39,2212.61 2939.72,2212.61 U1.8
  Top Layer w10: P_M2.1 2485,2660 2485,2360
NetP_M2_2: P_M2.2 U1.6 | length 988.5
  Top Layer w8: 2503,2367.46 2504.41,2367.46 2518.41,2353.46 2532.5,2353.46 2534.04,2355 2760,2355 2863.02,2251.98 2939.72,2251.98 U1.6
  Top Layer w10: P_M2.2 2485,2760 2485,2730 2503,2712 2503,2367.46 2512.73,2357.73
NetP_M2_3: P_M2.3 U1.5 | length 1056.7
  Top Layer w8: 2521,2374.91 2524.05,2374.91 2527.96,2371 2766.63,2371 2868.73,2268.9 U1.5
  Top Layer w10: P_M2.3 2485,2860 2485,2830 2505,2810 2505,2765.46 2521,2749.46 2521,2374.91 2525.46,2370.46
NetP_M2_4: P_M2.4 U1.4 | length 1124
  Top Layer w10: P_M2.4 2485,2960 2485,2930 2515,2900 2515,2855.46 2539,2831.46 2539,2388 2773.67,2388 2873.09,2288.58 U1.4
NetP_M2_5: P_M2.5 U1.3 | length 1194.8
  Top Layer w9: 2878.86,2308.27 U1.3
  Top Layer w10: P_M2.5 2485,3060 2485,3030 2525,2990 2525,2945.46 2557,2913.46 2557,2406 2781.12,2406 2878.86,2308.27
NetP_M2_6: P_M2.6 U1.2 | length 1265.5
  Top Layer w9: 2884.63,2327.95 U1.2
  Top Layer w10: P_M2.6 2485,3160 2485,3130 2515,3100 2515,3055.46 2575,2995.46 2575,2424 2788.58,2424 2884.63,2327.95
NetP_M2_7: P_M2.7 U1.1 | length 1336.3
  Top Layer w9: 2890.4,2347.64 U1.1
  Top Layer w10: P_M2.7 2485,3260 2485,3225 2515,3195 2515,3155.46 2593,3077.46 2593,2442 2796.04,2442 2890.4,2347.64
NetP_M2_8: P_M2.8 U1.64 | length 1466.4
  Top Layer w8: 3000,2405.16 U1.64
  Top Layer w10: P_M2.8 2485,3360 2485,3315 2510,3290 2510,3260.46 2611,3159.46 2611,2460 2803.49,2460 2858.33,2405.16 3000,2405.16
NetP_SPI_1: P_SPI.1 U1.11 | length 1203.5
  Top Layer w10: 2525,1450 2623.4,1548.4 2623.4,2056.23 2716.19,2149.02 2940.72,2149.02 U1.11
  Top Layer w20: P_SPI.1 2410,1470 2430,1450 2525,1450
NetP_SPI_2: P_SPI.2 PPWR_M2.3 | length 3752.3
  Bottom Layer w10: 2370,1685 2358,1697 2358,2110 2358,2190.75 2370,2202.75
  Bottom Layer w20: 2370,1685 P_SPI.2 ; 2370,2202.75 2370,2445 2495,2570 2495,3580 2425,3650 2425,4620 2505,4700 2505,4820 2570,4885 2720,4885 PPWR_M2.3
NetP_SPI_4: P_SPI.4 U1.36 | length 1725.3
  Top Layer w10: U1.36 3475.32,2111.42 3576.74,2010 3581,2010 3605,1986 v1(3605,1985)
  Bottom Layer w20: P_SPI.4 2413,1842 2698,1842 2855,1685 3256,1685 3471,1900 3473.81,1900 3481.41,1892.41 3508.81,1865 3535,1865 3605,1935 v1@3605,1986
NetP_SPI_5: P_SPI.5 U1.34 | length 1256
  Top Layer w10: U1.34 3415,2072.05 3465,2022.05 v1(3465,2010)
  Bottom Layer w20: P_SPI.5 2445,1910 2715,1910 2745,1880 3335,1880 v1(3465,2010)
NetP_SPI_6: P_SPI.6 U1.35 | length 1663.6
  Top Layer w10: U1.35 3458.27,2091.73 3523,2027 3523,2010 3525,2008 v1(3525,1945)
  Top Layer w20: v1(2835,1970) 2840,1970 2855,1955 v1(2855,1775)
  Bottom Layer w20: P_SPI.6 2485,1970 v1(2835,1970) ; v1(2855,1775) 3290.81,1775 3457.91,1942.09 3455,1945 v1(3525,1945)
NetR2_2: R2.2 U1.53 | length 521.3
  Top Layer w8: U1.53 3228.9,2765 ; 3340,2765 3346.5,2771.5
  Top Layer w20: 3228.9,2765 3340,2765 ; 3346.5,2771.5 R2.2
NetR6_1: R6.1 U1.33 | length 362.8
  Top Layer w8: U1.33 3377.52,1937.48 3471.5,1843.5 3525,1843.5
  Top Layer w20: 3525,1843.5 R6.1
VCC: C31.2 PPWR_M1.1 PPWR_M2.2 U5.2 U55.3 | length 2603.4
  Top Layer w20: PPWR_M2.2 2835,5095 2835,5160 4005,5160 4025,5140 4025,5030 ; U5.2@3575.43,5020 3580.43,5015 3685,5015 3685,5150 ; U55.3 3930.28,5015 4025,5015 4025,5030 ; PPWR_M1.1 4400,4430 4275,4555 C31.2 4193.15,4696.85 4100,4790 4100,5010 4080,5030 4025,5030
pads on no net: ICD.6 J1.4 J1.5 J1.6 J1.MH3 J1.MH4

## Keep-outs
Top Layer:
  rectangle: 2950,2840 3020,2880
  rectangle: 4120,4535 4160,4585
Keep-Out Layer:
  lines w10: 2340,1025 2340,5205 4463,5205 4463,1025 2340,1025

## Text inside footprints (layer, text, board x,y; h text height)
C33: Top Overlay "+" at 3505.47,4570.47 h59.06
C60: Top Overlay "+" at 2985.47,4450.47 h59.06
JPWR: Mechanical 1 "Mech 2 - Clearance, move to internal plane if present" at 2351.26,4879.44 h11.81; Mechanical 1 "Mech 1 - Slot cut-out" at 2351.26,4899.13 h11.81; Mechanical 1 "Assign keep-out area to slot" at 2351.26,4938.5 h11.81; Mechanical 1 "Alert PCB fab to slot details" at 2351.26,4918.81 h11.81
U3_1: Top Overlay "1" at 3255.32,4842.09 h59.05; Top Overlay "3" at 3255.32,4938.39 h59.05